# Altium PCB AS5600.pcbdoc
Units mil, origin at the board's own origin, x right, y up, seen from the top; angles counter-clockwise.
Board outline 1581.74 x 1581.74 mil, 2 copper layers (Top Layer, Bottom Layer); 13 components, 8 nets, 42 pads, 12 vias.
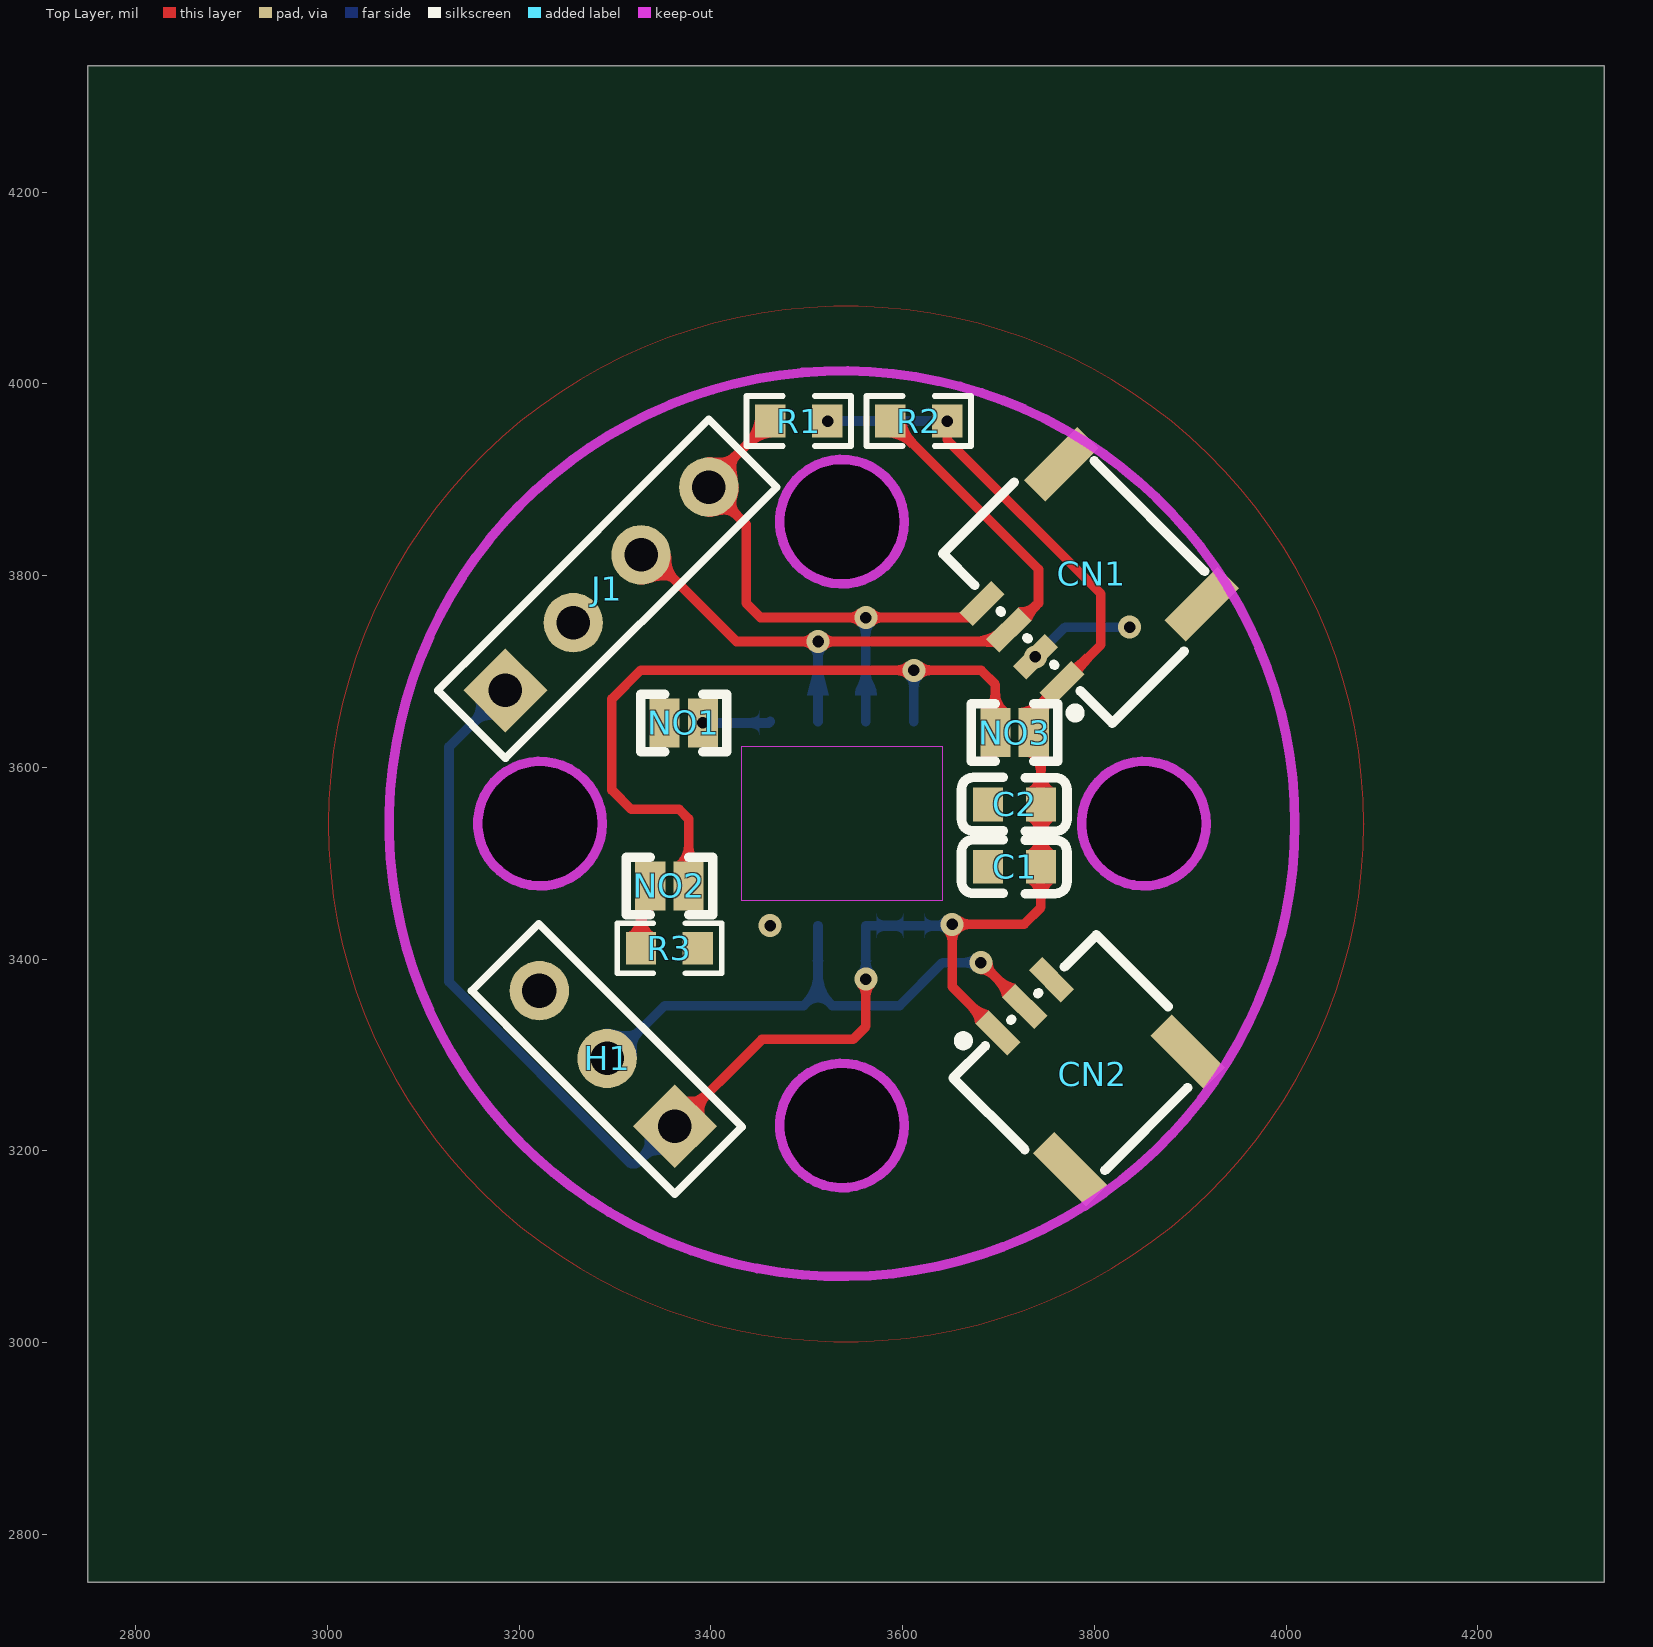
[diagram p0: Top Layer view]
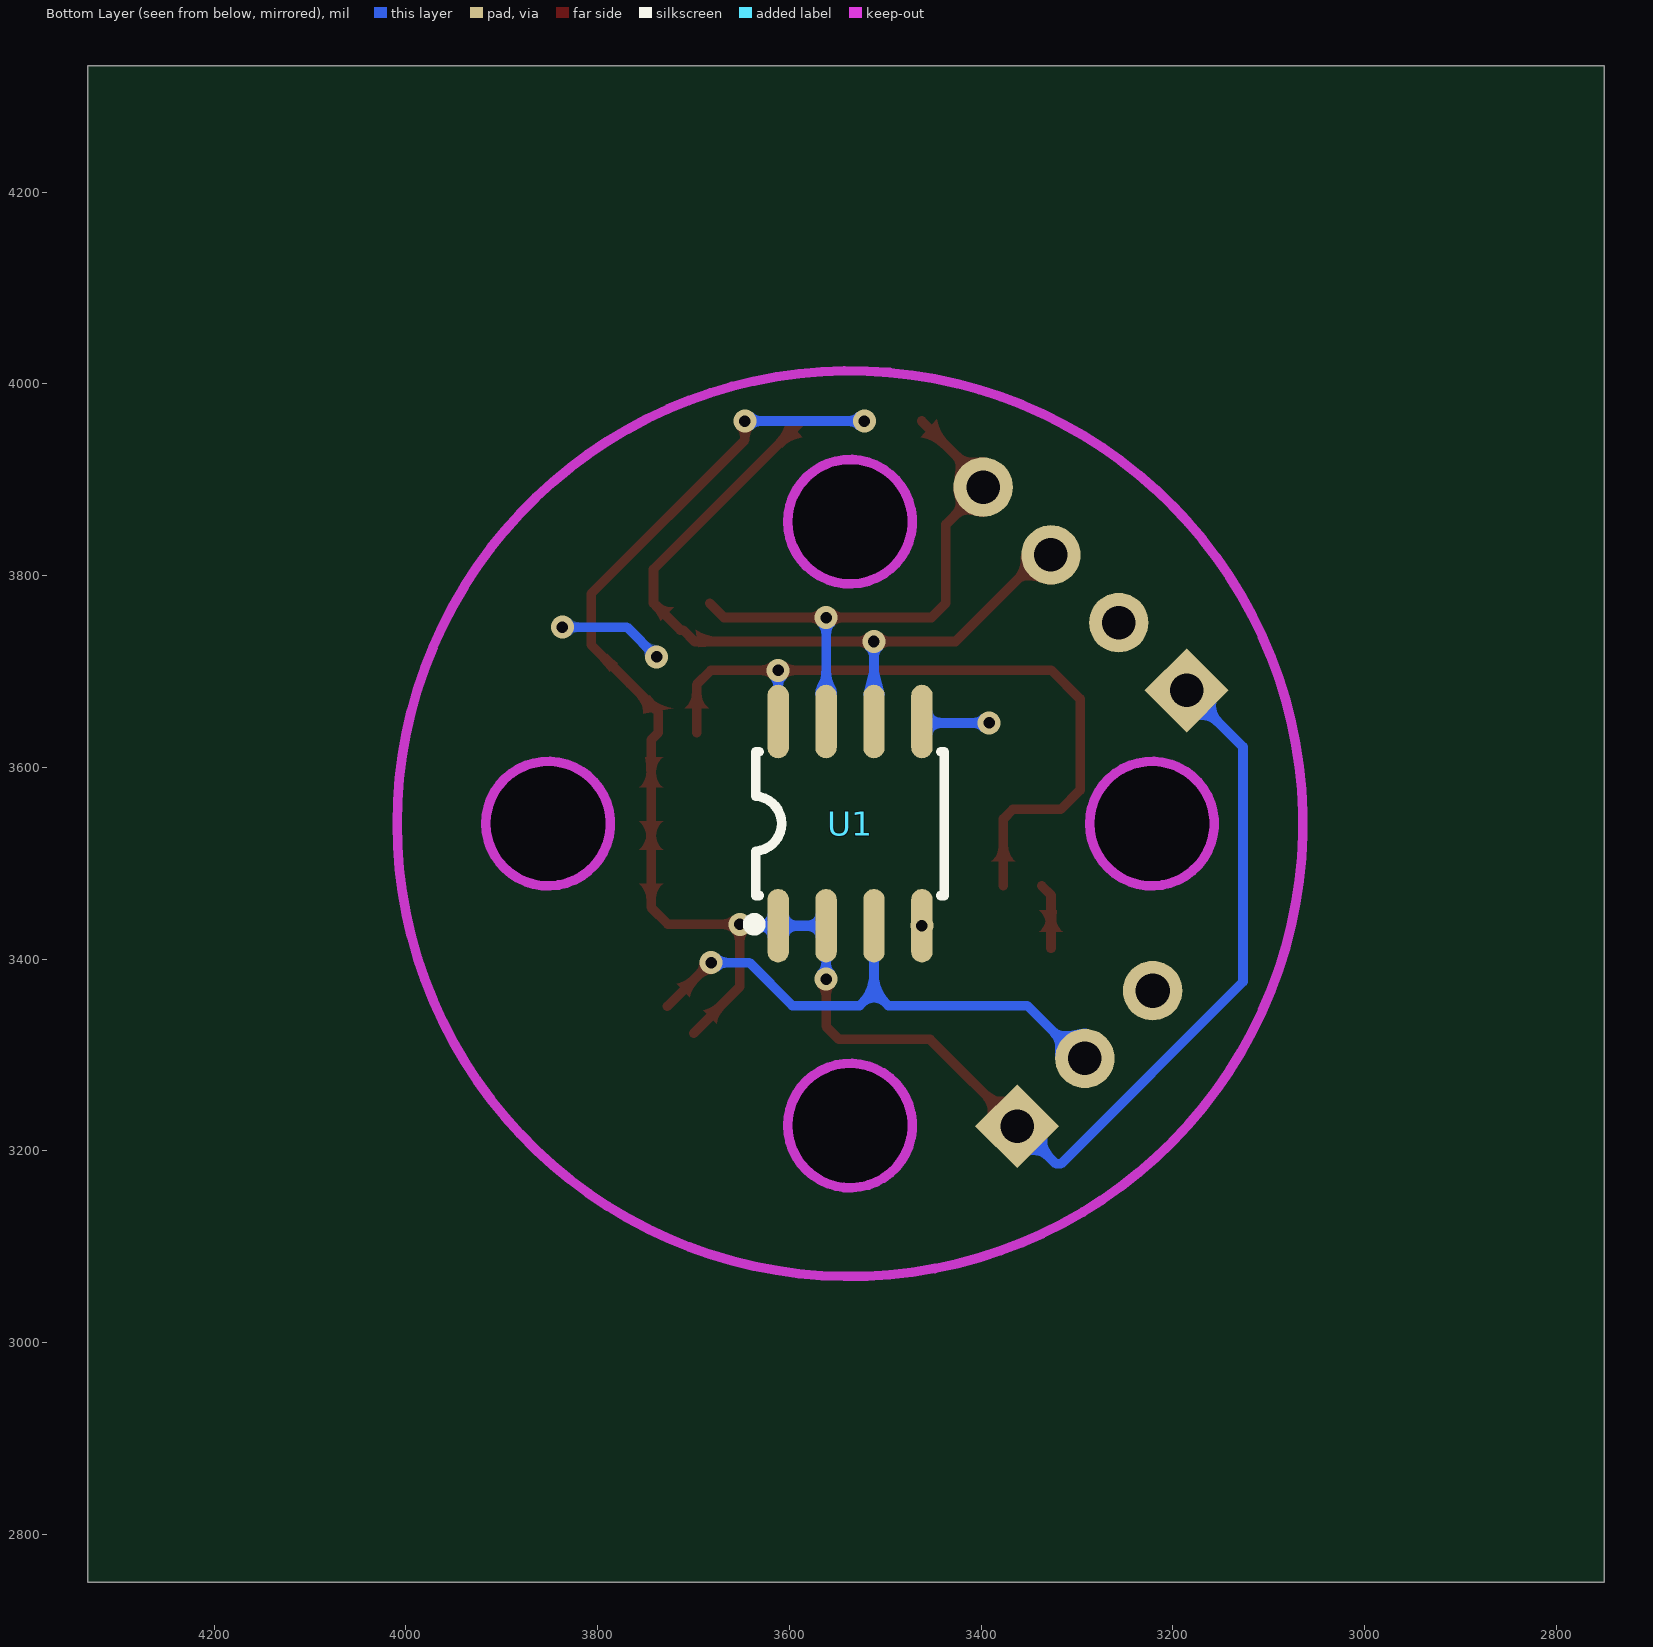
[diagram p1: Bottom Layer view, seen from below]

## Layer stack, top to bottom
Top Layer: signal copper (thickness not stored)
Dielectric: dielectric 12.6, FR-4, Dk 4.8
Bottom Layer: signal copper (thickness not stored)

## Board outline
4331.74,2750 2750,2750 2750,4331.74 4331.74,4331.74
cut-out: 3286.68,3541.26 ccw(c3221.71,3541.26) 3156.75,3541.26 ccw(c3221.71,3541.26)
cut-out: 3601.64,3226.3 ccw(c3536.67,3226.3) 3471.71,3226.3 ccw(c3536.67,3226.3)
cut-out: 3601.64,3856.22 ccw(c3536.67,3856.22) 3471.71,3856.22 ccw(c3536.67,3856.22)
cut-out: 3916.59,3541.26 ccw(c3851.63,3541.26) 3786.67,3541.26 ccw(c3851.63,3541.26)

## Components (designator, comment, footprint, x,y, rotation, side; value= is the part's Value field where it differs from the comment)
C1 "100nf" C0603 3716.67,3496.26 r0 top
C2 "10u" C0603 3716.67,3561.26 r0 top
CN1 "HDGC1002WR-S-4P" CONN-SMD_4P-P1.00_HDGC_HDGC1002WR-S-4P 3781.67,3786.26 r135 top
CN2 "HDGC1002WR-S-3P" CONN-SMD_3P-P1.00_HDGC_HDGC1002WR-S-3P 3781.67,3296.26 r45 top
H1 "HDR-F-2.54_1x3" HDR-F-2.54_1X3 3291.67,3296.26 r135 top
J1 "HDR-M-2.54_1x4" HDR-M-2.54_1X4 3291.67,3786.26 r45 top
NO1 "短路连接点" 短路连接点 3371.67,3646.26 r180 top
NO2 "短路连接点" 短路连接点 3356.67,3476.26 r0 top
NO3 "短路连接点" 短路连接点 3716.67,3636.26 r180 top
R1 "4.7k" R0603 3491.67,3961.26 r0 top
R2 "4.7k" R0603 3616.67,3961.26 r0 top
R3 "10K" R0603 3356.67,3411.26 r180 top
U1 "AS5600-ASOM" SOIC-8_L5.0-W4.0-P1.27-LS6.0-BL 3536.67,3541.26 r180 bottom

## Footprints (in the part's own frame and the unit in brackets; to place one, negate y for a bottom-side part, rotate by r counter-clockwise, add the part's x,y. Pads: shape width x height; smd on the part's side, far side on the other; paste and mask are expansions set on the pad)
C0603 [mm]
  rect 0.8x0.9 smd: 1(-0.7,0) 2(0.7,0)
  silkscreen extent -1.41,-0.71 1.39,0.72
CONN-SMD_3P-P1.00_HDGC_HDGC1002WR-S-3P [mm]
  rect 0.5x1.2 smd: 1(-1,1.95) 2(0,1.95) 3(1,1.95)
  rect 0.8x2 smd: 4(2.2,-1.95) 5(-2.2,-1.95)
  silkscreen extent -2.68,-2.62 2.68,2.58
CONN-SMD_4P-P1.00_HDGC_HDGC1002WR-S-4P [mm]
  rect 0.5x1.2 smd: 1(-1.5,2.05) 2(-0.5,2.05) 3(0.5,2.05) 4(1.5,2.05)
  rect 0.8x2 smd: 5(2.625,-2.05) 6(-2.625,-2.05)
  silkscreen extent -3.18,-2.72 3.17,2.49
HDR-F-2.54_1X3 [mil]
  rect 62x62 hole 35: 1(-100,0)
  round 62 hole 35: 2(0,0)
  round 62 hole 36: 3(100,0)
  silkscreen extent -150,-49 150,50
HDR-M-2.54_1X4 [mil]
  rect 62x62 hole 35: 1(-150.01,0)
  round 62 hole 35: 2(-49.99,-0.01) 3(50,-0.01) 4(150.01,0)
  silkscreen extent -200,-50 200,50
R0603 [mil]
  rect 31.75x34.02 smd: 1(-29.66,0) 2(29.66,0)
  silkscreen extent -55,-26 55,26
SOIC-8_L5.0-W4.0-P1.27-LS6.0-BL [mil]
  oval 22.38x76.78 smd: 1(-75,-106.5) 2(-25,-106.5) 3(25,-106.5) 4(75,-106.5) 5(75,106.5) 6(25,106.5) 7(-25,106.5) 8(-75,106.5)
  silkscreen extent -106,-111 98,75
短路连接点 [mm]
  rect 0.8x1.3 smd: 1(-0.508,0) 2(0.508,0)
  silkscreen extent -1.14,-0.76 1.14,0.76

## Via types
v1: diameter 24, hole 12, Top Layer to Bottom Layer, 12 vias

## Nets (pads, with @x,y where several pads share a name; then routed paths per layer and width w, separated by ;. In a path a pad name is that pad's centre, name@x,y a point inside that pad or via, vN(x,y) a via of type N, cw(c..) or ccw(c..) an arc to the next point about the centre after c; other vN are vias at no path point)
+3.3V: C1.2 C2.2 CN1.1 CN2.1 H1.1 J1.1 NO3.1 R1.2 R2.2 U1.1 U1.2 | length 2060.9
  Top Layer w10: H1.1 3453.07,3316.26 3548.27,3316.26 3561.67,3329.66 v1(3561.67,3379.09) ; v1(3646.33,3961.26) 3646.33,3941.6 3806.67,3781.26 3806.67,3727.74 CN1.1 3736.67,3657.74 NO3.1 3744.23,3628.7 C2.2 C1.2 3744.23,3453.82 3726.67,3436.26 v1(3651.67,3436.26) 3651.67,3371.26 CN2.1
  Bottom Layer w10: J1.1 3126.67,3621.26 3126.67,3376.26 3316.67,3186.26 3321.67,3186.26 3360.96,3225.55 H1.1 ; v1(3521.67,3961.26) v1(3646.33,3961.26) ; v1(3561.67,3379.09) U1.2 U1.1 3650.17,3434.76 v1(3651.67,3436.26)
DIR: NO2.2 NO3.2 U1.8 | length 779.6
  Top Layer w10: NO2.2 3376.67,3546.26 3366.67,3556.26 3316.67,3556.26 3296.67,3576.26 3296.67,3671.26 3326.67,3701.26 v1(3611.67,3701.26) 3681.67,3701.26 3696.67,3686.26 NO3.2
  Bottom Layer w10: U1.8 v1(3611.67,3701.26)
GND: C1.1 C2.1 CN1.2 CN1.5 CN1.6 CN2.3 CN2.4 CN2.5 H1.3 J1.2 NO1.2 R3.1 U1.4 | length 111
  Bottom Layer w10: v1(3738.53,3715.27) 3769.52,3746.26 v1(3836.67,3746.26)
  other v1: 3461.67,3434.76
NO2_1: NO2.1 R3.2 | length 69
  Top Layer w10: R3.2 3327.01,3466.6 NO2.1
OUT: CN2.2 H1.2 U1.3 | length 577
  Top Layer w10: v1(3681.67,3396.26) CN2.2
  Bottom Layer w10: H1.2 3296.67,3296.26 3351.67,3351.26 3496.67,3351.26 3511.67,3366.26 ; U1.3 3511.67,3366.26 ; v1(3681.67,3396.26) 3641.67,3396.26 3596.67,3351.26 3526.67,3351.26 3511.67,3366.26
SCL: CN1.4 J1.4 R1.1 U1.7 | length 599.7
  Top Layer w10: R1.1 3397.74,3896.99 J1.4 3436.67,3853.36 3436.67,3771.26 3451.67,3756.26 v1(3561.49,3756.26) 3668.17,3756.26 CN1.4@3682.87,3770.96
  Bottom Layer w10: v1(3561.49,3756.26) U1.7
SDA: CN1.3 J1.3 R2.1 U1.6 | length 806.1
  Top Layer w10: J1.3@3327.07,3821.66 3336.27,3821.66 3426.67,3731.26 v1(3511.67,3731.26) 3698.87,3731.26 CN1.3 ; R2.1 3741.67,3806.6 3741.67,3771.26 3713.52,3743.11 CN1.3
  Bottom Layer w10: U1.6 v1(3511.67,3731.26)
U1_5: NO1.1 U1.5 | length 70.6
  Bottom Layer w10: v1(3391.67,3646.26) 3460.17,3646.26 U1.5

## Polygon pours and split planes (outlines as drawn)
GND on Top Layer (solid, remove dead copper, pour order 0): 4081,3540.87 ccw(c3540.87,3540.87) 3000.74,3540.87 ccw(c3540.87,3540.87)
GND on Bottom Layer (solid, remove dead copper, pour order 4): 4081.74,3540.87 ccw(c3540.87,3540.87) 3000,3540.87 ccw(c3540.87,3540.87)

## Keep-outs
Top Layer:
  region: 3431.67,3621.26 3431.67,3461.26 3641.67,3461.26 3641.67,3621.26
Board Outline Layer:
  circle w10: c3536.67,3541.26 r472.44
Multi-Layer:
  circle w10: c3221.71,3541.26 r64.96
  circle w10: c3536.67,3226.3 r64.96
  circle w10: c3536.67,3856.22 r64.96
  circle w10: c3851.63,3541.26 r64.96

## Other copper
Top Layer:
  region net NO2_1: 3332.01,3443.27 3322.01,3443.27 cw(c3303.26,3443.27) 3314.51,3428.27 3339.51,3428.27 cw(c3350.76,3443.27)
  region net NO2_1: 3322.01,3435.67 3332.01,3435.67 cw(c3350.76,3435.67) 3339.51,3450.67 3320.96,3450.67 cw(c3214.82,3435.67)
  region net SDA: 3357.99,3792.88 3365.06,3799.95 3363.96,3801.15 3362.98,3802.39 3362.13,3803.69 3361.39,3805.03 3360.76,3806.42 3360.22,3807.84 3359.76,3809.3 3359.22,3811.55 3358.81,3813.86 3358.36,3817.83 3357.97,3823.55 3325.09,3790.67 3325.99,3790.65 3327.91,3790.75 3329.97,3791.03 3333.25,3791.7 3342.56,3794.04 3346.01,3794.76 3348.23,3795.09 3350.35,3795.24 3351.37,3795.25 3352.35,3795.2 3353.29,3795.09 3354.19,3794.91 3355.05,3794.66 3355.87,3794.34 3356.63,3793.94 3357.34,3793.45
  region net DIR: 3381.67,3516.85 3371.67,3516.85 cw(c3352.92,3516.85) 3364.17,3501.85 3389.17,3501.85 cw(c3400.42,3516.85)
  region net +3.3V: 3398.44,3254.55 3391.37,3261.62 cw(c3378.11,3274.88) 3375.46,3256.32 3393.13,3238.64 cw(c3411.69,3241.3)
  region net SCL: 3428.79,3920.97 3421.72,3928.04 3420.61,3926.99 3419.5,3926.09 3418.78,3925.57 3418.05,3925.1 3417.33,3924.69 3416.61,3924.33 3415.89,3924.02 3415.16,3923.76 3414.44,3923.53 3413.35,3923.27 3412.25,3923.09 3411.13,3922.98 3409.61,3922.92 3407.26,3922.96 3400.77,3923.33 3397.87,3923.35 3395.8,3923.27 3428.68,3890.39 3428.71,3892.01 3428.6,3893.8 3428.11,3897.79 3426.64,3907.67 3426.36,3910.91 3426.32,3912.96 3426.42,3914.91 3426.53,3915.83 3426.69,3916.71 3426.9,3917.54 3427.16,3918.34 3427.47,3919.08 3427.85,3919.77 3428.29,3920.4
  region net SCL: 3424.04,3858.95 3431.12,3866.01 3429.87,3867.35 3429.15,3868.21 3428.54,3869.05 3428,3869.86 3427.55,3870.66 3427.18,3871.45 3426.88,3872.22 3426.65,3872.98 3426.48,3873.73 3426.37,3874.48 3426.31,3875.23 3426.3,3875.97 3426.33,3876.72 3426.45,3877.86 3426.72,3879.4 3427.86,3884.47 3428.31,3886.86 3428.58,3888.93 3428.71,3890.6 3428.75,3892.36 3428.69,3894.23 3395.76,3861.4 3397.65,3861.33 3399.42,3861.36 3401.08,3861.49 3403.17,3861.76 3405.56,3862.21 3410.63,3863.36 3412.18,3863.63 3413.32,3863.76 3414.07,3863.79 3414.81,3863.78 3415.56,3863.73 3416.31,3863.61 3417.06,3863.45 3417.82,3863.21 3418.6,3862.91 3419.38,3862.54 3420.18,3862.09 3421,3861.55 3421.84,3860.93 3422.7,3860.21
  region net SCL: 3435.53,3941.85 3441.47,3933.65 cw(c3467.99,3907.13) 3462.68,3944.25 3446.14,3963.06 cw(c3409.02,3968.37)
  region net SDA: 3495.34,3736.26 3495.34,3726.26 3495.9,3726.24 3496.47,3726.17 3497.04,3726.06 3497.61,3725.92 3498.17,3725.74 3499.28,3725.28 3500.36,3724.72 3501.39,3724.08 3502.38,3723.37 3503.74,3722.26 3503.74,3740.26 3502.38,3739.15 3501.39,3738.45 3500.36,3737.8 3499.28,3737.24 3498.17,3736.79 3497.61,3736.61 3497.04,3736.46 3496.47,3736.35 3495.9,3736.28
  region net SDA: 3528.01,3726.26 3528.01,3736.26 3527.44,3736.28 3526.88,3736.35 3526.31,3736.46 3525.74,3736.61 3525.18,3736.79 3524.07,3737.24 3522.99,3737.8 3521.96,3738.45 3520.97,3739.15 3519.61,3740.26 3519.61,3722.26 3520.97,3723.37 3521.96,3724.08 3522.99,3724.72 3524.07,3725.28 3525.18,3725.74 3525.74,3725.92 3526.31,3726.06 3526.88,3726.17 3527.44,3726.24
  region net SCL: 3545.16,3761.26 3545.16,3751.26 3545.72,3751.24 3546.29,3751.17 3546.86,3751.06 3547.43,3750.92 3547.99,3750.74 3549.1,3750.28 3550.18,3749.72 3551.21,3749.08 3552.2,3748.37 3553.56,3747.26 3553.56,3765.26 3552.2,3764.15 3551.21,3763.45 3550.18,3762.8 3549.1,3762.24 3547.99,3761.79 3547.43,3761.61 3546.86,3761.46 3546.29,3761.35 3545.72,3761.28
  region net +3.3V: 3556.67,3362.75 3566.67,3362.75 3566.7,3363.32 3566.76,3363.89 3566.87,3364.46 3567.02,3365.02 3567.2,3365.59 3567.66,3366.69 3568.22,3367.77 3568.86,3368.81 3569.56,3369.8 3570.67,3371.15 3552.67,3371.15 3553.79,3369.8 3554.49,3368.81 3555.13,3367.77 3555.69,3366.69 3556.15,3365.59 3556.33,3365.02 3556.48,3364.46 3556.58,3363.89 3556.65,3363.32
  region net SCL: 3577.83,3751.26 3577.83,3761.26 3577.26,3761.28 3576.7,3761.35 3576.13,3761.46 3575.56,3761.61 3575,3761.79 3573.89,3762.24 3572.81,3762.8 3571.78,3763.45 3570.79,3764.15 3569.43,3765.26 3569.43,3747.26 3570.79,3748.37 3571.78,3749.08 3572.81,3749.72 3573.89,3750.28 3575,3750.74 3575.56,3750.92 3576.13,3751.06 3576.7,3751.17 3577.26,3751.24
  region net DIR: 3595.34,3706.26 3595.34,3696.26 3595.9,3696.24 3596.47,3696.17 3597.04,3696.06 3597.61,3695.92 3598.17,3695.74 3599.28,3695.28 3600.36,3694.72 3601.39,3694.08 3602.38,3693.37 3603.74,3692.26 3603.74,3710.26 3602.38,3709.15 3601.39,3708.45 3600.36,3707.8 3599.28,3707.24 3598.17,3706.79 3597.61,3706.61 3597.04,3706.46 3596.47,3706.35 3595.9,3706.28
  region net SDA: 3607.56,3933.65 3613.5,3941.85 cw(c3640.01,3968.37) 3602.89,3963.06 3586.34,3944.25 cw(c3581.04,3907.13)
  region net DIR: 3628.01,3696.26 3628.01,3706.26 3627.44,3706.28 3626.88,3706.35 3626.31,3706.46 3625.74,3706.61 3625.18,3706.79 3624.07,3707.24 3622.99,3707.8 3621.96,3708.45 3620.97,3709.15 3619.61,3710.26 3619.61,3692.26 3620.97,3693.37 3621.96,3694.08 3622.99,3694.72 3624.07,3695.28 3625.18,3695.74 3625.74,3695.92 3626.31,3696.06 3626.88,3696.17 3627.44,3696.24
  region net +3.3V: 3641.33,3944.92 3651.33,3944.92 3651.36,3945.49 3651.42,3946.06 3651.53,3946.63 3651.68,3947.19 3651.86,3947.76 3652.32,3948.86 3652.88,3949.94 3653.52,3950.98 3654.22,3951.97 3655.33,3953.32 3637.33,3953.32 3638.45,3951.97 3639.15,3950.98 3639.79,3949.94 3640.35,3948.86 3640.81,3947.76 3640.99,3947.19 3641.14,3946.63 3641.24,3946.06 3641.31,3945.49
  region net +3.3V: 3646.67,3419.92 3656.67,3419.92 3656.7,3420.49 3656.76,3421.06 3656.87,3421.63 3657.02,3422.19 3657.2,3422.76 3657.66,3423.86 3658.22,3424.94 3658.86,3425.98 3659.56,3426.97 3660.67,3428.32 3642.67,3428.32 3643.79,3426.97 3644.49,3425.98 3645.13,3424.94 3645.69,3423.86 3646.15,3422.76 3646.33,3422.19 3646.48,3421.63 3646.58,3421.06 3646.65,3420.49
  region net +3.3V: 3668.01,3431.26 3668.01,3441.26 3667.44,3441.28 3666.88,3441.35 3666.31,3441.46 3665.74,3441.61 3665.18,3441.79 3664.07,3442.24 3662.99,3442.8 3661.96,3443.45 3660.97,3444.15 3659.61,3445.26 3659.61,3427.26 3660.97,3428.37 3661.96,3429.08 3662.99,3429.72 3664.07,3430.28 3665.18,3430.74 3665.74,3430.92 3666.31,3431.06 3666.88,3431.17 3667.44,3431.24
  region net +3.3V: 3675.96,3353.74 3668.89,3346.67 cw(c3650.99,3329.02) 3675.89,3332.46 3689.81,3346.38 cw(c3694.63,3372.14)
  region net SDA: 3674.91,3736.26 3679.13,3726.26 cw(c3679.13,3603.54) 3695.18,3725.21 3697.41,3743.76 cw(c3674.91,3773.76) 3674.91,3736.26
  region net OUT: 3689.69,3381.17 3696.76,3388.25 3696.38,3388.66 3696.02,3389.11 3695.7,3389.59 3695.4,3390.09 3695.13,3390.62 3694.67,3391.72 3694.3,3392.88 3694.03,3394.07 3693.82,3395.27 3693.65,3397.01 3680.92,3384.29 3682.67,3384.11 3683.86,3383.91 3685.05,3383.63 3686.21,3383.27 3687.32,3382.81 3687.84,3382.54 3688.35,3382.24 3688.82,3381.91 3689.27,3381.56
  region net DIR: 3701.67,3676.85 3691.67,3676.85 cw(c3672.92,3676.85) 3684.17,3661.85 3709.17,3661.85 cw(c3720.42,3676.85)
  region net OUT: 3703.61,3381.39 3696.54,3374.32 cw(c3678.43,3356.2) 3703.72,3360.29 3717.64,3374.2 cw(c3721.78,3399.55)
  region net SDA: 3742.95,3765.47 3735.88,3772.54 cw(c3721.84,3786.57) 3720.43,3766.78 3734.35,3752.86 cw(c3772.02,3736.4)
  region net +3.3V: 3758.46,3672.46 3744.32,3672.46 cw(c3718.52,3698.26) 3720.93,3661.85 3752.42,3655.81 cw(c3773.25,3657.68)
  region net +3.3V: 3739.23,3595.67 3749.23,3595.67 cw(c3856.43,3595.67) 3750.29,3610.67 3731.73,3610.67 cw(c3720.48,3595.67)
  region net +3.3V: 3749.23,3593.98 3739.23,3593.98 cw(c3720.48,3593.98) 3731.73,3578.98 3756.73,3578.98 cw(c3767.98,3593.98)
  region net +3.3V: 3749.23,3528.98 3739.23,3528.98 cw(c3720.48,3528.98) 3731.73,3513.98 3756.73,3513.98 cw(c3767.98,3528.98)
  region net +3.3V: 3739.23,3463.55 3749.23,3463.55 cw(c3767.98,3463.55) 3756.73,3478.55 3731.73,3478.55 cw(c3720.48,3463.55)
  region net +3.3V: 3739.23,3528.55 3749.23,3528.55 cw(c3767.98,3528.55) 3756.73,3543.55 3731.73,3543.55 cw(c3720.48,3528.55)
  region net +3.3V: 3735.52,3663.66 3742.59,3656.59 cw(c3818.39,3580.79) 3753.94,3666.45 3745.38,3675.01 cw(c3659.72,3739.45)
  region net +3.3V: 3797.21,3711.2 3790.14,3718.28 cw(c3714.34,3794.07) 3778.79,3708.41 3787.35,3699.85 cw(c3873.01,3635.41)
Bottom Layer:
  region net +3.3V: 3149.54,3651.2 3156.61,3644.13 cw(c3169.87,3630.87) 3172.52,3649.43 3154.84,3667.11 cw(c3136.28,3664.46)
  region net OUT: 3327.55,3320.07 3320.48,3327.14 3319.9,3326.63 3319.27,3326.19 3318.57,3325.81 3317.83,3325.49 3317.03,3325.23 3316.19,3325.03 3315.3,3324.87 3313.42,3324.7 3311.41,3324.69 3308.21,3324.91 3302.65,3325.69 3294.13,3327.01 3292.25,3327.18 3290.53,3327.23 3289.73,3327.2 3322.61,3294.32 3322.7,3296.85 3322.64,3300.6 3322.37,3306.86 3322.41,3308.79 3322.5,3309.92 3322.65,3311.03 3322.87,3312.12 3323.17,3313.21 3323.42,3313.93 3323.71,3314.65 3324.05,3315.37 3324.43,3316.08 3324.87,3316.8 3325.36,3317.52 3326.21,3318.61 3327.19,3319.7
  region net +3.3V: 3325.61,3197.27 3332.68,3190.2 cw(c3345.94,3176.94) 3348.59,3195.5 3330.91,3213.18 cw(c3312.35,3210.53)
  region net U1_5: 3408.01,3641.26 3408.01,3651.26 3407.44,3651.28 3406.88,3651.35 3406.31,3651.46 3405.74,3651.61 3405.18,3651.79 3404.07,3652.24 3402.99,3652.8 3401.96,3653.45 3400.97,3654.15 3399.61,3655.26 3399.61,3637.26 3400.97,3638.37 3401.96,3639.08 3402.99,3639.72 3404.07,3640.28 3405.18,3640.74 3405.74,3640.92 3406.31,3641.06 3406.88,3641.17 3407.44,3641.24
  region net U1_5: 3435.49,3651.26 3435.49,3641.26 3440.33,3641.18 3442.29,3641.03 3443.53,3640.87 3444.7,3640.63 3445.8,3640.32 3446.31,3640.14 3446.81,3639.93 3447.27,3639.69 3447.72,3639.43 3448.13,3639.14 3448.52,3638.82 3448.87,3638.48 3449.2,3638.1 3449.49,3637.69 3449.74,3637.24 3449.96,3636.76 3450.15,3636.24 3450.29,3635.68 3450.4,3635.08 3450.46,3634.44 3450.49,3633.76 3450.49,3658.76 3450.46,3658.08 3450.4,3657.44 3450.29,3656.84 3450.15,3656.29 3449.96,3655.77 3449.74,3655.28 3449.49,3654.84 3449.2,3654.43 3448.87,3654.05 3448.52,3653.7 3448.13,3653.38 3447.72,3653.09 3447.27,3652.83 3446.81,3652.6 3446.31,3652.39 3445.8,3652.2 3444.7,3651.89 3443.53,3651.66 3442.29,3651.49 3440.33,3651.34
  region net OUT: 3504.6,3352.12 3505.31,3352.74 3506.08,3353.28 3506.92,3353.74 3507.81,3354.11 3508.74,3354.4 3509.7,3354.61 3510.68,3354.73 3511.67,3354.77 3512.67,3354.73 3513.65,3354.61 3514.61,3354.4 3515.54,3354.11 3516.43,3353.74 3517.27,3353.28 3518.04,3352.74 3518.75,3352.12 3525.82,3359.19 3524.96,3360.12 3524.11,3361.19 3523.28,3362.37 3522.06,3364.34 3520.91,3366.48 3519.86,3368.74 3518.92,3371.08 3518.11,3373.42 3517.46,3375.73 3516.99,3377.94 3516.79,3379.33 3516.69,3380.64 3516.67,3381.26 3506.67,3381.26 3506.62,3380 3506.47,3378.65 3506.22,3377.22 3505.69,3374.97 3504.99,3372.64 3504.13,3370.29 3503.15,3367.98 3502.06,3365.75 3500.89,3363.66 3499.66,3361.76 3498.81,3360.64 3497.96,3359.64 3497.53,3359.19
  region net OUT: 3506.67,3382.55 3516.67,3382.55 3516.62,3383.91 3516.46,3385.2 3516.23,3386.42 3515.65,3388.66 3514.95,3391.17 3514.76,3392.09 3514.69,3392.54 3514.65,3392.98 3514.64,3393.41 3514.65,3393.83 3514.7,3394.25 3514.79,3394.66 3514.92,3395.06 3515.09,3395.46 3515.3,3395.85 3515.57,3396.24 3515.88,3396.63 3516.25,3397.01 3516.68,3397.39 3517.17,3397.77 3517.73,3398.15 3505.62,3398.15 3506.17,3397.77 3506.67,3397.39 3507.09,3397.01 3507.47,3396.63 3507.78,3396.24 3508.05,3395.85 3508.26,3395.46 3508.43,3395.06 3508.56,3394.66 3508.64,3394.25 3508.69,3393.83 3508.71,3393.41 3508.7,3392.98 3508.65,3392.54 3508.5,3391.64 3508.14,3390.2 3507.25,3387 3506.99,3385.82 3506.8,3384.56 3506.69,3383.24
  region net SDA: 3506.67,3714.92 3516.67,3714.92 3516.7,3715.49 3516.76,3716.06 3516.87,3716.63 3517.02,3717.19 3517.2,3717.76 3517.66,3718.86 3518.22,3719.94 3518.86,3720.98 3519.56,3721.97 3520.67,3723.32 3502.67,3723.32 3503.79,3721.97 3504.49,3720.98 3505.13,3719.94 3505.69,3718.86 3506.15,3717.76 3506.33,3717.19 3506.48,3716.63 3506.58,3716.06 3506.65,3715.49
  region net SDA: 3516.67,3699.97 3506.67,3699.97 3506.6,3699.54 3501.06,3677.56 3500.55,3675.4 3500.49,3674.96 3522.86,3674.96 3522.79,3675.4 3517.25,3697.38 3516.74,3699.54
  region net +3.3V: 3538.01,3956.26 3538.01,3966.26 3537.44,3966.28 3536.88,3966.35 3536.31,3966.46 3535.74,3966.61 3535.18,3966.79 3534.07,3967.24 3532.99,3967.8 3531.96,3968.45 3530.97,3969.15 3529.61,3970.26 3529.61,3952.26 3530.97,3953.37 3531.96,3954.08 3532.99,3954.72 3534.07,3955.28 3535.18,3955.74 3535.74,3955.92 3536.31,3956.06 3536.88,3956.17 3537.44,3956.24
  region net SCL: 3556.5,3739.92 3566.5,3739.93 3566.53,3740.5 3566.59,3741.07 3566.7,3741.64 3566.85,3742.21 3567.03,3742.77 3567.48,3743.88 3568.05,3744.96 3568.69,3745.99 3569.39,3746.98 3570.51,3748.34 3552.51,3748.31 3553.25,3747.42 3553.97,3746.47 3554.65,3745.46 3555.25,3744.4 3555.76,3743.3 3555.98,3742.74 3556.16,3742.18 3556.3,3741.61 3556.41,3741.05 3556.48,3740.48
  region net +3.3V: 3566.67,3395.43 3556.67,3395.43 3556.65,3394.86 3556.58,3394.29 3556.48,3393.73 3556.33,3393.16 3556.15,3392.6 3555.69,3391.49 3555.13,3390.41 3554.49,3389.37 3553.79,3388.39 3552.67,3387.03 3570.67,3387.03 3569.56,3388.39 3568.86,3389.37 3568.22,3390.41 3567.66,3391.49 3567.2,3392.6 3567.02,3393.16 3566.87,3393.73 3566.76,3394.29 3566.7,3394.86
  region net SCL: 3566.58,3700.01 3556.58,3699.94 3556.51,3697.68 3556.38,3696.17 3556.19,3694.8 3555.93,3693.56 3555.64,3692.42 3555.3,3691.37 3554.79,3690.08 3553.97,3688.31 3552.42,3685.12 3551.9,3683.86 3551.55,3682.84 3551.23,3681.73 3550.96,3680.52 3550.75,3679.2 3550.59,3677.74 3550.49,3675.56 3550.49,3674.96 3572.86,3674.96 3572.79,3677.23 3572.65,3678.74 3572.45,3680.12 3572.19,3681.37 3571.88,3682.51 3571.53,3683.56 3571.02,3684.85 3570.17,3686.63 3568.72,3689.51 3568.17,3690.75 3567.8,3691.75 3567.46,3692.83 3567.17,3694.01 3566.92,3695.3 3566.74,3696.71 3566.62,3698.28
  region net +3.3V: 3556.67,3382.55 3566.67,3382.55 3566.62,3383.91 3566.46,3385.2 3566.23,3386.42 3565.65,3388.66 3564.95,3391.17 3564.76,3392.09 3564.69,3392.54 3564.65,3392.98 3564.64,3393.41 3564.65,3393.83 3564.7,3394.25 3564.79,3394.66 3564.92,3395.06 3565.09,3395.46 3565.3,3395.85 3565.57,3396.24 3565.88,3396.63 3566.25,3397.01 3566.68,3397.39 3567.17,3397.77 3567.73,3398.15 3555.62,3398.15 3556.17,3397.77 3556.67,3397.39 3557.09,3397.01 3557.47,3396.63 3557.78,3396.24 3558.05,3395.85 3558.26,3395.46 3558.43,3395.06 3558.56,3394.66 3558.64,3394.25 3558.69,3393.83 3558.71,3393.41 3558.7,3392.98 3558.65,3392.54 3558.5,3391.64 3558.14,3390.2 3557.25,3387 3556.99,3385.82 3556.8,3384.56 3556.69,3383.24
  region net +3.3V: 3587.86,3429.76 3587.86,3439.76 3583.02,3439.84 3581.06,3439.99 3579.82,3440.16 3578.65,3440.39 3577.55,3440.7 3577.03,3440.89 3576.54,3441.1 3576.07,3441.33 3575.63,3441.59 3575.22,3441.88 3574.83,3442.2 3574.48,3442.55 3574.15,3442.93 3573.86,3443.34 3573.6,3443.78 3573.38,3444.27 3573.2,3444.79 3573.05,3445.34 3572.95,3445.94 3572.88,3446.58 3572.86,3447.26 3572.86,3422.26 3572.88,3422.94 3572.95,3423.58 3573.05,3424.18 3573.2,3424.74 3573.38,3425.26 3573.6,3425.74 3573.86,3426.19 3574.15,3426.6 3574.48,3426.98 3574.83,3427.32 3575.22,3427.64 3575.63,3427.93 3576.07,3428.19 3576.54,3428.43 3577.03,3428.64 3577.55,3428.82 3578.65,3429.13 3579.82,3429.37 3581.06,3429.53 3583.02,3429.68
  region net +3.3V: 3585.49,3439.76 3585.49,3429.76 3590.33,3429.68 3592.29,3429.53 3593.53,3429.37 3594.7,3429.13 3595.8,3428.82 3596.31,3428.64 3596.81,3428.43 3597.27,3428.19 3597.72,3427.93 3598.13,3427.64 3598.52,3427.32 3598.87,3426.98 3599.2,3426.6 3599.49,3426.19 3599.74,3425.74 3599.96,3425.26 3600.15,3424.74 3600.29,3424.18 3600.4,3423.58 3600.46,3422.94 3600.49,3422.26 3600.49,3447.26 3600.46,3446.58 3600.4,3445.94 3600.29,3445.34 3600.15,3444.79 3599.96,3444.27 3599.74,3443.78 3599.49,3443.34 3599.2,3442.93 3598.87,3442.55 3598.52,3442.2 3598.13,3441.88 3597.72,3441.59 3597.27,3441.33 3596.81,3441.1 3596.31,3440.89 3595.8,3440.7 3594.7,3440.39 3593.53,3440.16 3592.29,3439.99 3590.33,3439.84
  region net DIR: 3616.67,3699.97 3606.67,3699.97 3606.73,3698.61 3606.89,3697.33 3607.11,3696.11 3607.69,3693.86 3608.39,3691.36 3608.59,3690.43 3608.65,3689.98 3608.7,3689.55 3608.71,3689.12 3608.69,3688.69 3608.64,3688.28 3608.56,3687.87 3608.43,3687.46 3608.26,3687.07 3608.05,3686.67 3607.78,3686.28 3607.47,3685.9 3607.09,3685.51 3606.67,3685.13 3606.17,3684.75 3605.62,3684.37 3617.73,3684.37 3617.17,3684.75 3616.68,3685.13 3616.25,3685.51 3615.88,3685.9 3615.57,3686.28 3615.3,3686.67 3615.09,3687.07 3614.92,3687.46 3614.79,3687.87 3614.7,3688.28 3614.65,3688.69 3614.64,3689.12 3614.65,3689.55 3614.69,3689.98 3614.85,3690.89 3615.21,3692.32 3616.1,3695.52 3616.36,3696.71 3616.55,3697.96 3616.66,3699.28
  region net DIR: 3606.67,3684.92 3616.67,3684.92 3616.7,3685.49 3616.76,3686.06 3616.87,3686.63 3617.02,3687.19 3617.2,3687.76 3617.66,3688.86 3618.22,3689.94 3618.86,3690.98 3619.56,3691.97 3620.67,3693.32 3602.67,3693.32 3603.79,3691.97 3604.49,3690.98 3605.13,3689.94 3605.69,3688.86 3606.15,3687.76 3606.33,3687.19 3606.48,3686.63 3606.58,3686.06 3606.65,3685.49
  region net +3.3V: 3637.86,3429.76 3637.86,3439.76 3633.02,3439.84 3631.06,3439.99 3629.82,3440.16 3628.65,3440.39 3627.55,3440.7 3627.03,3440.89 3626.54,3441.1 3626.07,3441.33 3625.63,3441.59 3625.22,3441.88 3624.83,3442.2 3624.48,3442.55 3624.15,3442.93 3623.86,3443.34 3623.6,3443.78 3623.38,3444.27 3623.2,3444.79 3623.05,3445.34 3622.95,3445.94 3622.88,3446.58 3622.86,3447.26 3622.86,3422.26 3622.88,3422.94 3622.95,3423.58 3623.05,3424.18 3623.2,3424.74 3623.38,3425.26 3623.6,3425.74 3623.86,3426.19 3624.15,3426.6 3624.48,3426.98 3624.83,3427.32 3625.22,3427.64 3625.63,3427.93 3626.07,3428.19 3626.54,3428.43 3627.03,3428.64 3627.55,3428.82 3628.65,3429.13 3629.82,3429.37 3631.06,3429.53 3633.02,3429.68
  region net +3.3V: 3630,3966.26 3630,3956.26 3630.56,3956.24 3631.13,3956.17 3631.7,3956.06 3632.27,3955.92 3632.83,3955.74 3633.94,3955.28 3635.02,3954.72 3636.05,3954.08 3637.04,3953.37 3638.4,3952.26 3638.4,3970.26 3637.04,3969.15 3636.05,3968.45 3635.02,3967.8 3633.94,3967.24 3632.83,3966.79 3632.27,3966.61 3631.7,3966.46 3631.13,3966.35 3630.56,3966.28
  region net +3.3V: 3635.34,3439.76 3635.34,3429.76 3636.41,3429.73 3637.53,3429.63 3638.67,3429.46 3639.8,3429.2 3640.9,3428.86 3641.42,3428.66 3641.94,3428.43 3642.43,3428.18 3642.89,3427.9 3643.33,3427.59 3643.74,3427.26 3643.74,3445.26 3642.65,3444.24 3640.8,3442.31 3639.93,3441.48 3639.47,3441.11 3639,3440.78 3638.5,3440.48 3637.96,3440.23 3637.39,3440.03 3636.76,3439.89 3636.08,3439.79
  region net OUT: 3665.34,3401.26 3665.34,3391.26 3665.9,3391.24 3666.47,3391.17 3667.04,3391.06 3667.61,3390.92 3668.17,3390.74 3669.28,3390.28 3670.36,3389.72 3671.39,3389.08 3672.38,3388.37 3673.74,3387.26 3673.74,3405.26 3672.38,3404.15 3671.39,3403.45 3670.36,3402.8 3669.28,3402.24 3668.17,3401.79 3667.61,3401.61 3667.04,3401.46 3666.47,3401.35 3665.9,3401.28

## Silkscreen, mask and mechanical layers (free items; w line width, h text height)
Mechanical Layer:
  circle w1: c3221.71,3541.26 r64.96
  circle w1: c3536.67,3226.3 r64.96
  circle w1: c3536.67,3856.22 r64.96
  circle w1: c3851.63,3541.26 r64.96